# Altium PCB V_16.PcbDoc
Units mm, origin at the board's own origin, x right, y up, seen from the top; angles counter-clockwise.
Board outline 152.4 x 101.6 mm, 2 copper layers (Top Layer, Bottom Layer); 6 components, 10 nets, 74 pads, 14 vias.
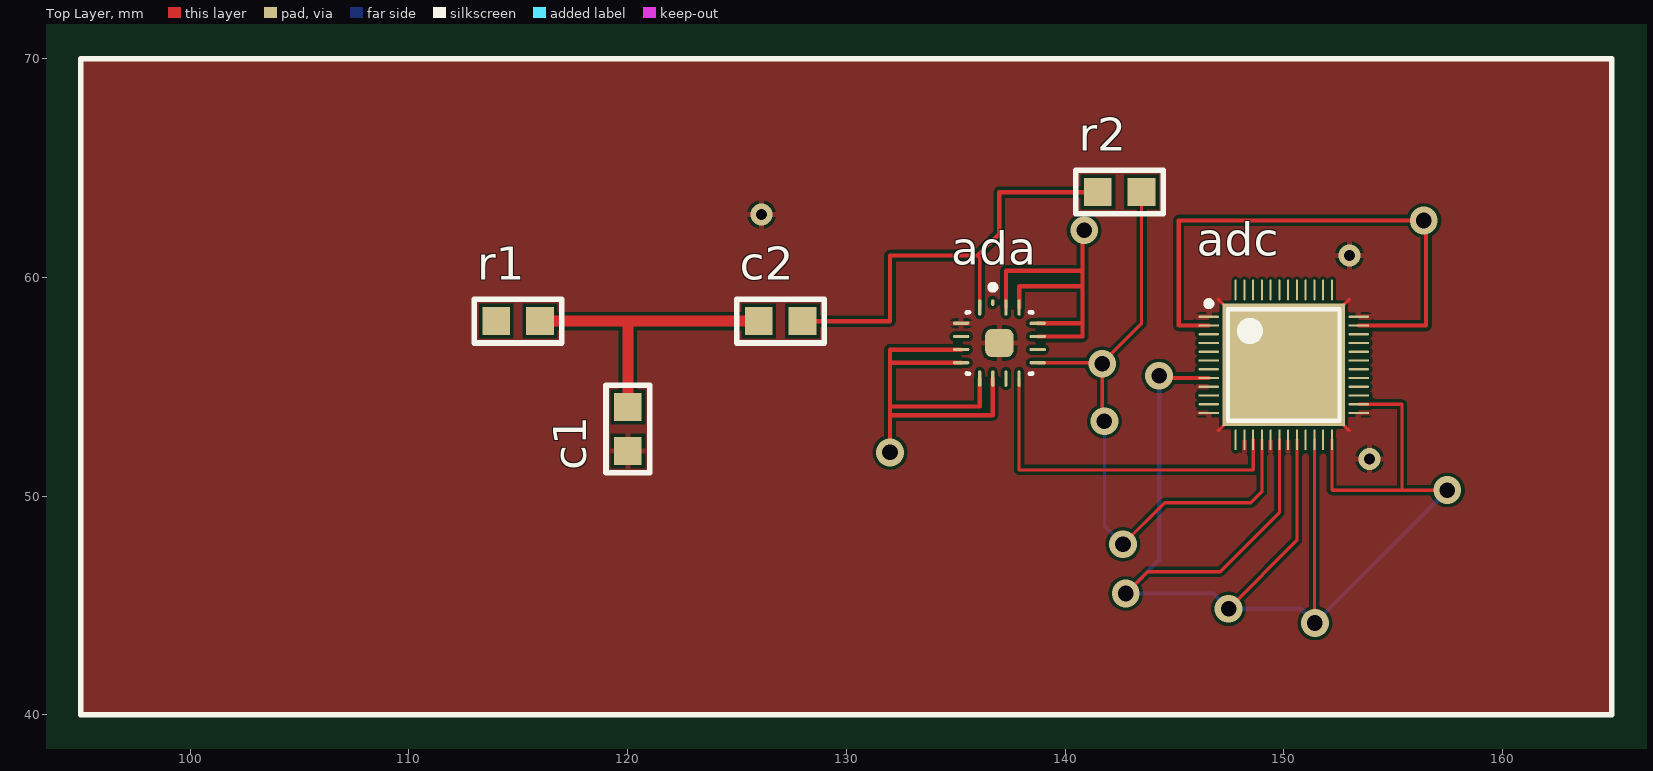
[diagram p0: Top Layer view]
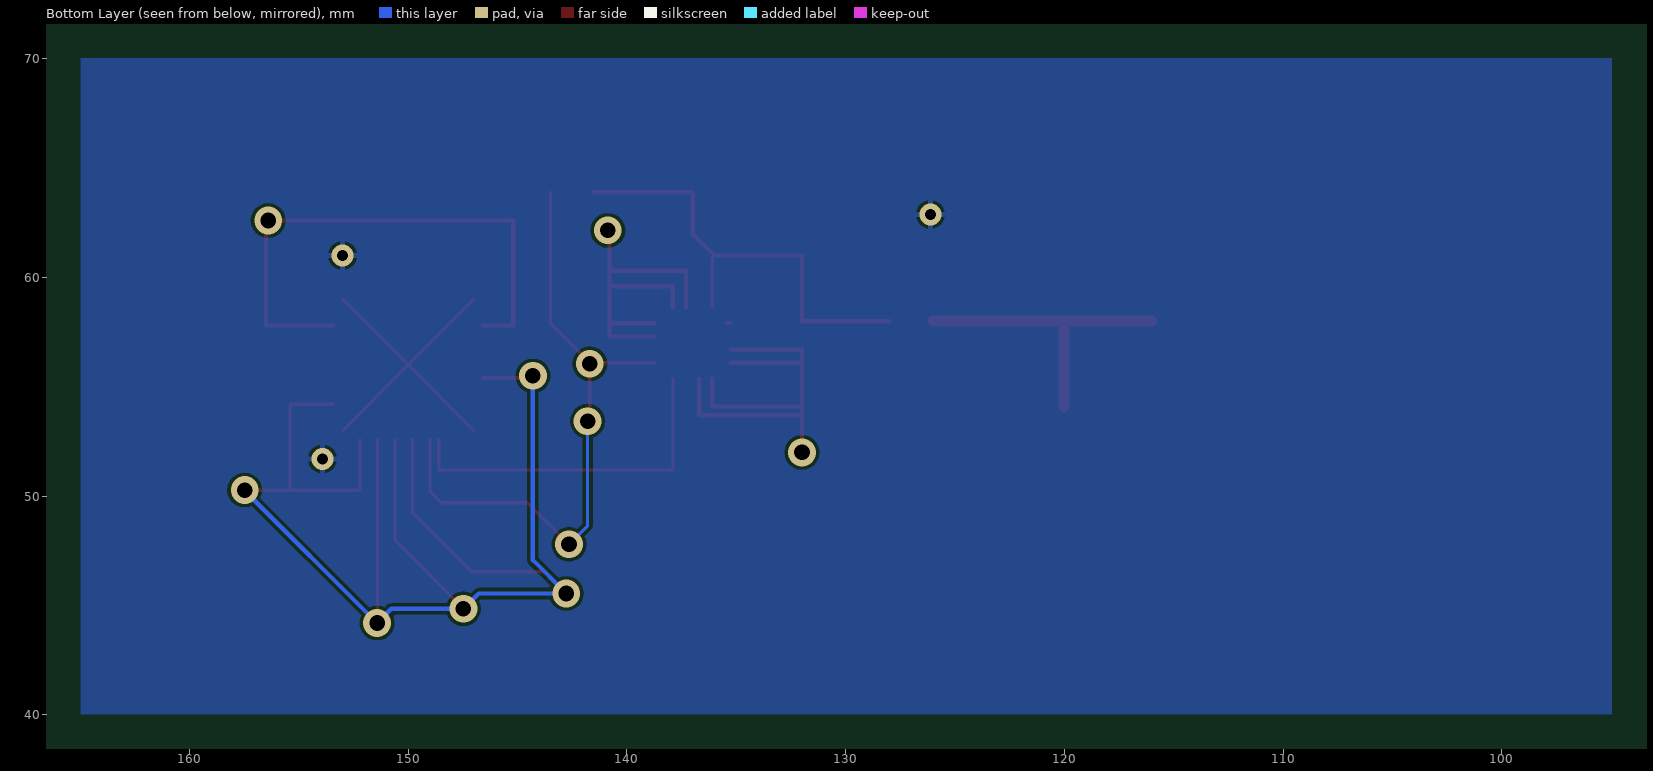
[diagram p1: Bottom Layer view, seen from below]

## Layer stack, top to bottom
Top Layer: signal copper 0.0356
Dielectric: dielectric 0.32, FR-4, Dk 4.8
Bottom Layer: signal copper 0.0356

## Board outline
25.4,25.4 177.8,25.4 177.8,127 25.4,127

## Design rules (kind name [scope] priority, off if disabled: settings)
Clearance [All] p1: gap=0.15
PolygonConnect [All] p1: connectstyle=Relief reliefconductorwidth=0.254 reliefentries=4 polygonreliefangle="90 Angle"
RoutingVias [All] p1: holewidth=0.711 width=1.27 viastyle="Through Hole" minholewidth=0.711 minwidth=1.27 maxholewidth=0.711 maxwidth=1.27
SilkscreenOverComponentPads [All] p1: minsilkscreentomaskgap=0.254
SolderMaskExpansion [All] p1: expansion=0.102
Width [All] p1: maxlimit=0.5 minlimit=0.15 preferedwidth=0.25 minimp=50.000000 maximp=50.000000 favimp=50.000000
27 further rules are at their usual default settings.

## Components (designator, comment, footprint, x,y, rotation, side; value= is the part's Value field where it differs from the comment)
ada "Operational Amplifier" ADA4932-1 137,57 r0 top
adc "ADC" ADS61B49 150,56 r0 top
c1 "Capacitor" С 120.015,52.07 r90 top
c2 "Capacitor" С 126,58 r0 top
r1 "Reg" R_0.0085 114,58 r0 top
r2 "Reg" R_0.0085 141.5,63.9 r0 top

## Footprints (in the part's own frame and the unit in brackets; to place one, negate y for a bottom-side part, rotate by r counter-clockwise, add the part's x,y. Pads: shape width x height; smd on the part's side, far side on the other; paste and mask are expansions set on the pad)
ADA4932-1 [mm] "LCC, 16-Pins, Body 3,0x2,8mm (max), Pitch 0,60mm, IPC Medium Density"
  oval 0.15x0.3 smd: 1(-0.3,1.85)
  oval 0.15x0.75 smd: 2(-0.9,1.625) 7(-0.9,-1.625) 8(-0.3,-1.625) 9(0.3,-1.625) 10(0.9,-1.625) 15(0.9,1.625) 16(0.3,1.625)
  oval 0.75x0.15 smd: 3(-1.75,0.9) 4(-1.75,0.3) 5(-1.75,-0.3) 6(-1.75,-0.9) 11(1.75,-0.9) 12(1.75,-0.3) 13(1.75,0.3) 14(1.75,0.9)
  rrect50% 1.3x1.3 smd: 17(0,0)
  silkscreen extent -1.5,-1.4 1.5,2.67, body extent -1.5,-1.37 1.5,1.38, height 1
ADS61B49 [mm]
  oval 0.95x0.1 smd: 1(-3.425,2.2) 2(-3.425,1.8) 3(-3.425,1.4) 4(-3.425,1) 5(-3.425,0.6) 6(-3.425,0.2) 7(-3.425,-0.2) 8(-3.425,-0.6) 9(-3.425,-1) 10(-3.425,-1.4) 11(-3.425,-1.8) 12(-3.425,-2.2) 25(3.425,-2.2) 26(3.425,-1.8) 27(3.425,-1.4) 28(3.425,-1) 29(3.425,-0.6) 30(3.425,-0.2) 31(3.425,0.2) 32(3.425,0.6) 33(3.425,1) 34(3.425,1.4) 35(3.425,1.8) 36(3.425,2.2)
  oval 0.1x0.95 smd: 13(-2.2,-3.425) 14(-1.8,-3.425) 15(-1.4,-3.425) 16(-1,-3.425) 17(-0.6,-3.425) 18(-0.2,-3.425) 19(0.2,-3.425) 20(0.6,-3.425) 21(1,-3.425) 22(1.4,-3.425) 23(1.8,-3.425) 24(2.2,-3.425) 37(2.2,3.425) 38(1.8,3.425) 39(1.4,3.425) 40(1,3.425) 41(0.6,3.425) 42(0.2,3.425) 43(-0.2,3.425) 44(-0.6,3.425) 45(-1,3.425) 46(-1.4,3.425) 47(-1.8,3.425) 48(-2.2,3.425)
  rect 5.6x5.6 smd: 49(0,0)
  silkscreen extent -3.55,-2.55 2.55,2.92, body extent -3.05,-3.05 3.05,3.05, height 1
R_0.0085 [mm]
  rect 1.27x1.27 smd: 1(0,0) 2(2,0)
  silkscreen extent -1,-1 3,1
С [mm]
  rect 1.27x1.27 smd: 1(0,0) 2(2,0)
  silkscreen extent -1,-1 3,1

## Via types
v1: diameter 1.27, hole 0.711, Top Layer to Bottom Layer, 10 vias
v2: diameter 1, hole 0.5, Top Layer to Bottom Layer, 3 vias
v3: diameter 1.27/1.27 (per signal layer), hole 0.711, Top Layer to Bottom Layer, 1 vias

## Nets (pads, with @x,y where several pads share a name; then routed paths per layer and width w, separated by ;. In a path a pad name is that pad's centre, name@x,y a point inside that pad or via, vN(x,y) a via of type N, cw(c..) or ccw(c..) an arc to the next point about the centre after c; other vN are vias at no path point)
"1.8 V": adc.2 adc.35 | length 25.3
  Top Layer w0.2: adc.2 145.2,57.8 145.2,62.6 v1(156.4,62.6) 156.5,62.5 156.5,57.8 adc.35
"3.3 V": adc.8 adc.18 adc.20 adc.22 adc.24 adc.26 | length 73.4
  Top Layer w0.15: v1(142.775,45.55) 143.775,46.55 147.1,46.55 149.8,49.25 adc.18 ; v1(147.475,44.85) 150.6,47.975 adc.20 ; adc.22 151.4,44.225 v1(151.425,44.2) ; adc.24 152.2,50.3 152.225,50.275 155.4,50.275 ; adc.26 155.4,54.2 155.4,50.275 ; v1(157.475,50.275) 155.4,50.275
  Top Layer w0.2: v1(144.3,55.5) v1@144.35,55.45 ; v1@144.4,55.4 adc.8
  Bottom Layer w0.2: v1(144.3,55.5) 144.3,47.075 v1(142.775,45.55) 146.775,45.55 v1(147.475,44.85) 150.775,44.85 v1(151.425,44.2) 157.475,50.25 v1(157.475,50.275)
+5V: ada.5 ada.6 ada.7 ada.8 | length 22.9
  Top Layer w0.2: v1(132,52) 132,53.7 ; 132,54.1 136.1,54.1 ada.7 ; ada.6 132,56.1 ; ada.5 132,56.7 132,56.1 ; ada.8 136.7,53.7 132,53.7 ; 132,53.7 132,56.1
-5V: ada.13 ada.14 ada.15 ada.16 | length 18
  Top Layer w0.2: ada.16 137.3,60.3 140.8,60.3 ; ada.15 137.9,59.6 140.8,59.6 ; ada.13 140.8,57.3 140.8,57.9 ; ada.14 140.8,57.9 ; v1(140.875,62.15) 140.8,62.075 140.8,59.6 ; 140.8,57.9 140.8,59.6
GND: ada.3 ada.17 adc.1 adc.9 adc.12 adc.14 adc.17 adc.19 adc.25 adc.36 adc.49 c1.1 | length 17.2
  Top Layer w0.15: ada.3 ada.3@135.445,57.9 ; 147,53 adc.49 ; 147,59 adc.49 ; 153,53 adc.49 ; 153,59 adc.49
  other v2: 153.925,51.7 153,61 126.127,62.873
Netada_2: ada.2 c2.2 r2.1 | length 21.2
  Top Layer w0.15: 136,61 136.1,60.9 ada.2
  Top Layer w0.2: c2.2 132,58 132,61 136,61 137,62 137,63.9 r2.1
Netada_10: ada.10 adc.15 | length 16.3
  Top Layer w0.15: ada.10 137.9,51.2 148.6,51.2 adc.15
Netada_11: ada.11 adc.16 r2.2 | length 30.1
  Top Layer w0.15: ada.11 141.7,56.1 143.5,57.9 r2.2 ; v1@141.7,53.525 v3(141.7,56.05) ; v1@143.025,47.8 v1(142.65,47.8) 144.55,49.7 148.5,49.7 149,50.2 adc.16
  Bottom Layer w0.15: v1(141.8,53.425) 141.8,48.65 v1(142.65,47.8)
Netc1_2: c1.2 c2.1 r1.2 | length 13.9
  Top Layer w0.5: r1.2 120,58 ; c1.2 120.015,57.985 120,58 ; c2.1 120,58
Netr1_1: r1.1
pads on no net: ada.1 ada.4 ada.9 ada.12 adc.3 adc.4 adc.5 adc.6 adc.7 adc.10 adc.11 adc.13 adc.21 adc.23 adc.27 adc.28 adc.29 adc.30 adc.31 adc.32 adc.33 adc.34 adc.37 adc.38 adc.39 adc.40 adc.41 adc.42 adc.43 adc.44 adc.45 adc.46 adc.47 adc.48

## Polygon pours and split planes (outlines as drawn)
GND on Top Layer "Top Layer-No Net" (solid, pour order 26): 165,40 165,70 95,70 95,40
GND on Bottom Layer "Top Layer-No Net" (solid, pour order 26): 164.975,40.025 164.975,70.025 94.975,70.025 94.975,40.025

## Silkscreen, mask and mechanical layers (free items; w line width, h text height)
Top Overlay:
  lines w0.254: 95,40 165,40 165,70 95,70 95,40